# Altium PCB DC SUPPLY.PcbDoc
Units mm, origin at the board's own origin, x right, y up, seen from the top; angles counter-clockwise.
Board outline 96.39 x 54.1 mm, 2 copper layers (Top Layer, Bottom Layer); 46 components, 23 nets, 108 pads, 0 vias.
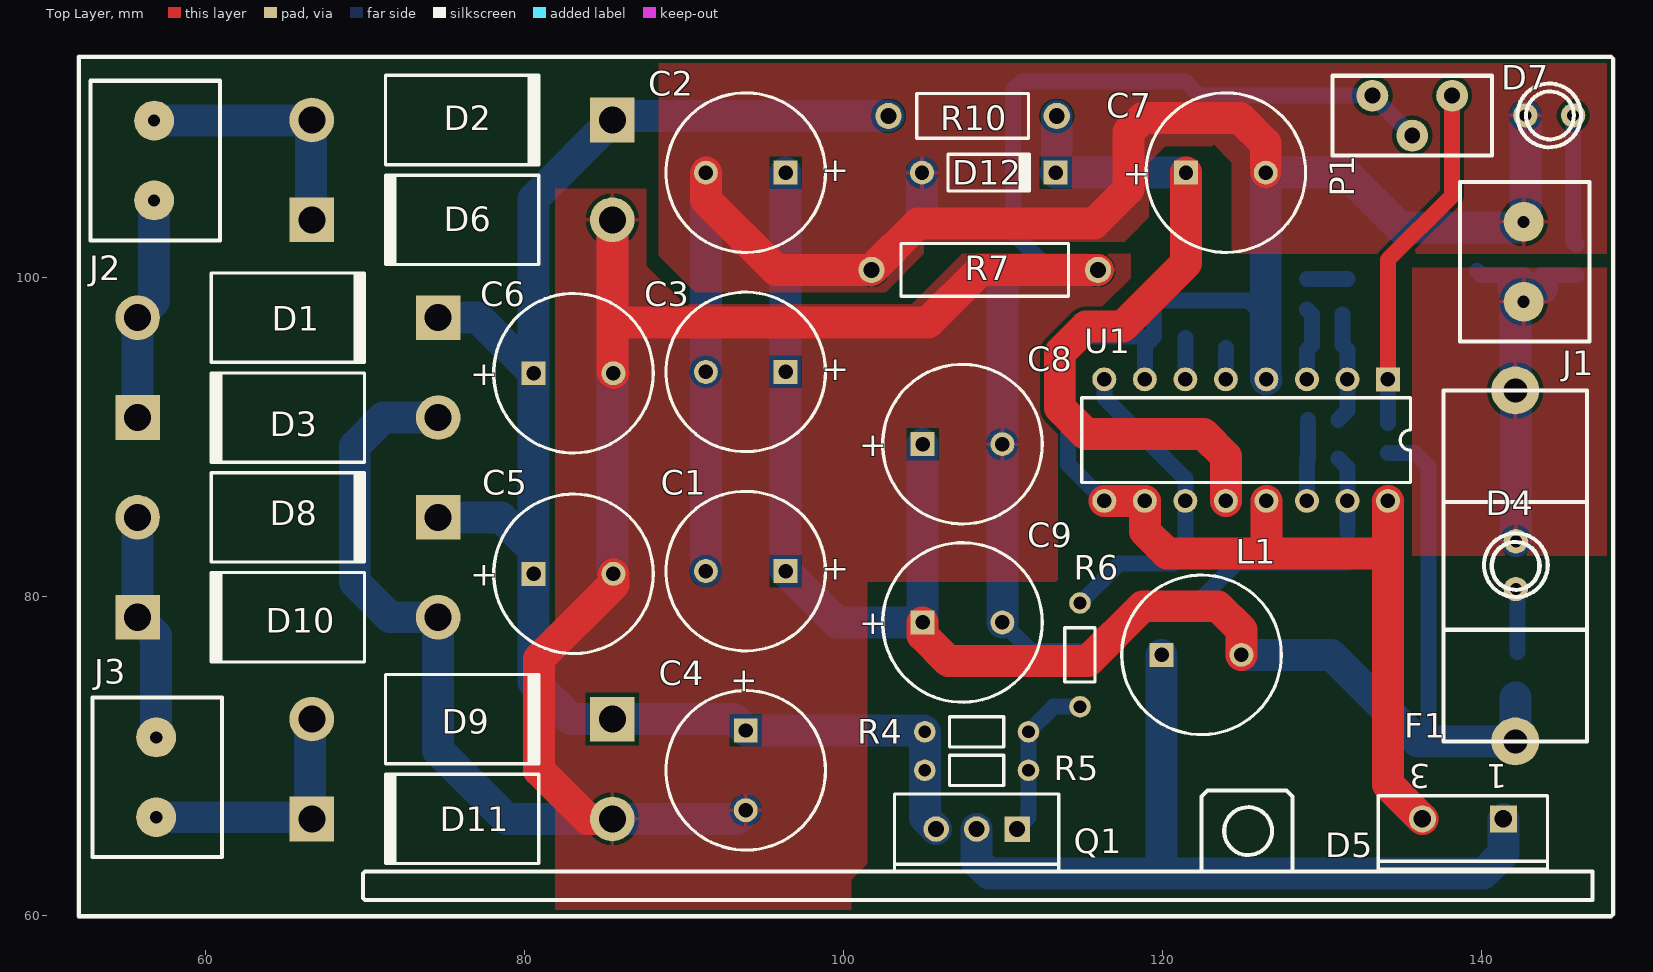
[diagram p0: Top Layer view]
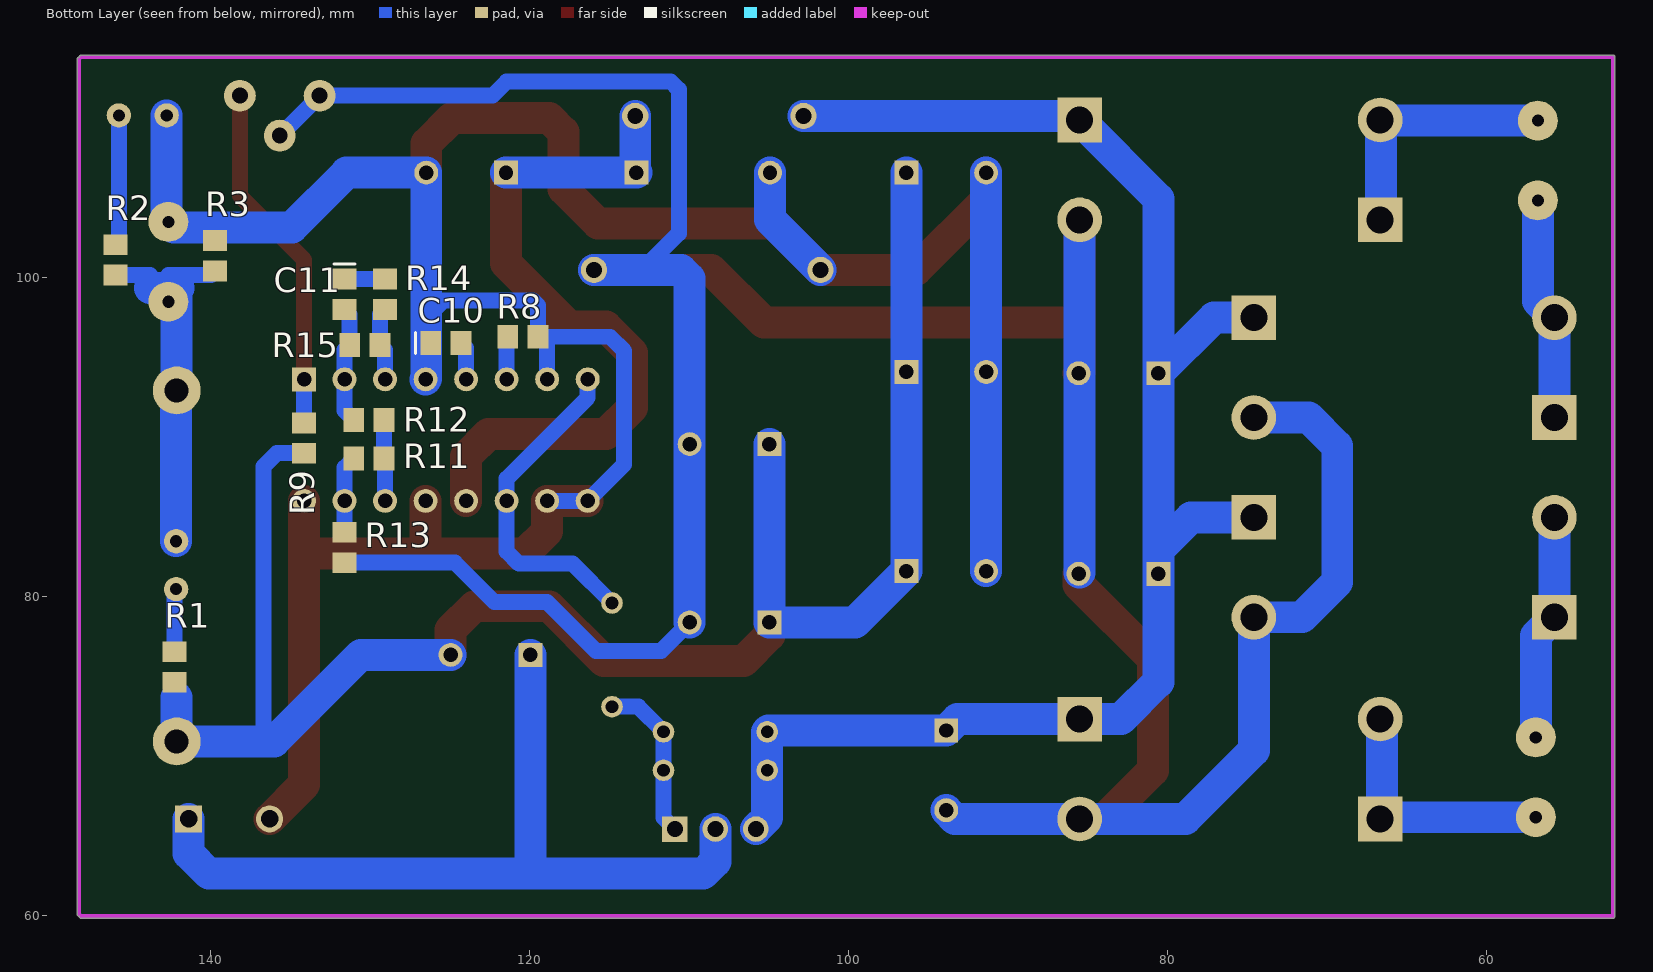
[diagram p1: Bottom Layer view, seen from below]

## Layer stack, top to bottom
Top Solder: solder mask 0.0102, Solder Resist, Dk 3.5
Top Layer: signal copper 0.0356
Dielectric 1: dielectric 0.32, FR-4, Dk 4.8
Bottom Layer: signal copper 0.0356
Bottom Solder: solder mask 0.0102, Solder Resist, Dk 3.5

## Board outline
52.07,59.817 148.082,59.817 ccw(c148.082,59.944) 148.173,59.854 ccw(c148.082,59.944) 148.209,59.944 ccw(c148.209,60.071) 148.299,59.98 ccw(c148.209,60.071) 148.336,60.071 148.336,113.665 ccw(c148.209,113.665) 148.299,113.756 ccw(c148.209,113.665) 148.209,113.792 ccw(c148.082,113.792) 148.173,113.882 ccw(c148.082,113.792) 148.082,113.919 52.07,113.919 ccw(c52.07,113.792) 51.943,113.792 51.943,59.944 ccw(c52.07,59.944)

## Design rules (kind name [scope] priority, off if disabled: settings)
Clearance [All] p1: gap=0.254
PolygonConnect [All] p1: connectstyle=Relief reliefconductorwidth=0.254 reliefentries=4 polygonreliefangle="90 Angle" airgapwidth=0.254
RoutingVias [All] p1: holewidth=0.711 width=1.27 viastyle="Through Hole" minholewidth=0.711 minwidth=1.27 maxholewidth=0.711 maxwidth=1.27
SolderMaskExpansion [All] p1: expansion=0.102
Width [All] p1: maxlimit=3 minlimit=0.254 preferedwidth=1
29 further rules are at their usual default settings.

## Components (designator, comment, footprint, x,y, rotation, side; value= is the part's Value field where it differs from the comment)
C1 "470uF" CAPPR5-10X16 93.853,81.576 r180 top
C2 "470uF" CAPPR5-10X16 93.853,106.553 r180 top
C3 "470uF" CAPPR5-10X16 93.853,94.065 r180 top
C4 "470uF" CAPPR5-10X16 93.853,69.088 r270 top
C5 "470uF" CAPPR5-10X16 83.058,81.407 r0 top
C6 "470uF" CAPPR5-10X16 83.058,93.98 r0 top
C7 "470uF" CAPPR5-10X16 123.952,106.553 r0 top
C8 "470uF" CAPPR5-10X16 107.442,89.535 r0 top
C9 "470uF" CAPPR5-10X16 107.442,78.359 r0 top
C10 "" 0805 125.222,95.885 r180 bottom
C11 "" 0805 131.572,98.933 r270 bottom
D1 "1N5400" DO-201AD 65.151,97.463 r0 top
D2 "1N5400" DO-201AD 76.073,109.855 r0 top
D3 "1N5400" DO-201AD 65.151,91.204 r180 top
D4 "FUSE BLOW LED" "LED 3 mm" 142.098,81.901 r270 top
D5 "Diode 10TQ035" TO-220AC 138.811,66.04 r180 top
D6 "1N5400" DO-201AD 76.073,103.596 r180 top
D7 "DC OK LED" "LED 3 mm" 144.272,110.109 r0 top
D8 "1N5400" DO-201AD 65.151,84.945 r0 top
D9 "1N5400" DO-201AD 76.073,72.299 r0 top
D10 "1N5400" DO-201AD 65.151,78.686 r180 top
D11 "1N5400" DO-201AD 76.073,66.04 r180 top
D12 "ZD15V" 299-02 109.093,106.553 r0 top
F1 "Fuse holder" "FUSE HOLDER" 142.24,81.915 r90 top
J1 "T3" TERMINAL_BLOCK_2 142.748,100.838 r0 top
J2 "T1" TERMINAL_BLOCK_2 56.896,107.188 r0 top
J3 "T2" TERMINAL_BLOCK_2 57.023,68.521 r0 top
L1 "B82462G4821M000" CAPPR5-10X16 122.428,76.327 r0 top
P1 "100K" POT 135.636,110.128 r180 top
Q1 "TIP125" 221A-02 108.331,65.405 r180 top
R1 "1K" ERA-0805 142.24,75.565 r270 bottom
R2 "2K2" ERA-0805 145.923,101.092 r270 bottom
R3 "2K2" ERA-0805 139.7,101.346 r270 bottom
R4 "100R" RD3.2x1.7 108.331,71.501 r0 top
R5 "100R" RD3.2x1.7 108.331,69.088 r0 top
R6 "100R" RD3.2x1.7 114.808,76.327 r270 top
R7 "0R22" R9x2.8 108.839,100.457 r180 top
R8 "47K" ERA-0805 120.396,96.266 r0 bottom
R9 "10K" ERA-0805 134.112,89.916 r270 bottom
R10 "1K" RD6.35x2.3 108.077,110.109 r180 top
R11 "5K1" ERA-0805 130.048,88.646 r180 bottom
R12 "5K1" ERA-0805 130.048,91.059 r180 bottom
R13 "150R" ERA-0805 131.572,83.058 r90 bottom
R14 "47K" ERA-0805 129.032,98.933 r270 bottom
R15 "1M" ERA-0805 130.302,95.758 r180 bottom
U1 "TL494CJ" J016 125.222,89.789 r180 top

## Footprints (in the part's own frame and the unit in brackets; to place one, negate y for a bottom-side part, rotate by r counter-clockwise, add the part's x,y. Pads: shape width x height; smd on the part's side, far side on the other; paste and mask are expansions set on the pad)
221A-02 [mm] "TO, Thru-Hole, Vertical, Heatsink Mounted; 3 In-Line Leads; Pitch 2.54 mm"
  rect 1.6x1.6 hole 1: 1(-2.54,0)
  round 1.6 hole 1: 2(0,0) 3(2.54,0)
  silkscreen extent -5.15,-2.2 5.15,2.7
299-02 [mm] "Diode, Axial; Body 5.1 x 2.3 mm (LxDia. max), Lead Dia. 0.56 mm (max)"
  round 1.5 hole 0.9: 1(-4.19,0)
  rect 1.5x1.5 hole 0.9: 2(4.19,0)
  silkscreen extent -2.55,-1.15 2.65,1.15
0805 [mm] "Chip Capacitor; Body 2.0 x 1.2 mm (LxW typ)"
  rect 1.3x1.5 smd: 1(-0.95,0) 2(0.95,0)
  silkscreen extent -1.9,-0.65 -1.9,0.65
CAPPR5-10X16 [mm] "Capacitor, Electrolytic, Radial; Body 10 x 16 mm (Dia.xH typ); Pin Spacing 5 mm (typ)"
  rect 1.5x1.5 hole 0.9: 1(-2.5,0)
  round 1.5 hole 0.9: 2(2.5,0)
  silkscreen extent -5,-5 5,5
DO-201AD [mm] "Diode, Axial; Body 9.5 x 5.6 mm (LxDia. max), Lead Dia. 1.32 mm (max)"
  round 2.8 hole 1.7: 1(-9.42,0)
  rect 2.8x2.8 hole 1.7: 2(9.42,0)
  silkscreen extent -4.8,-2.8 4.9,2.8
ERA-0805 [mm] "Chip Resistor; Body 2 x 1.3 mm (LxW typ)"
  rect 1.3x1.5 smd: 1(-0.95,0) 2(0.95,0)
"FUSE HOLDER" [mm] "Small glas fuse holder"
  round 3 hole 1.5: 1(-11.014,0.142) 2(10.986,0.142)
  silkscreen extent -11.01,-4.36 10.99,4.64, body extent -11.01,-3.86 10.99,4.14, height 13
J016 [mm] "DIP; 16 Leads; Row Spacing 7.62 mm; Pitch 2.54 mm"
  rect 1.5x1.5 hole 0.9: 1(-8.89,-3.81)
  round 1.5 hole 0.9: 2(-6.35,-3.81) 3(-3.81,-3.81) 4(-1.27,-3.81) 5(1.27,-3.81) 6(3.81,-3.81) 7(6.35,-3.81) 8(8.89,-3.81) 9(8.89,3.81) 10(6.35,3.81) 11(3.81,3.81) 12(1.27,3.81) 13(-1.27,3.81) 14(-3.81,3.81) 15(-6.35,3.81) 16(-8.89,3.81)
  silkscreen extent -10.3,-2.65 10.3,2.65
"LED 3 mm" [mil] "LED 3 mm"
  round 60 hole 30: 1(-60.95,1.26) 2(57.16,1.26)
  silkscreen extent -81,-77 77,80
POT [mm] "PIHER poti vertical"
  round 2 hole 1: 1(-2.5,-1.25) 2(2.5,-1.25) 3(0,1.25)
  silkscreen extent -5,-2.5 5,2.5
R9x2.8 [mm] "Resistor, Axial; Body 10.5 x 3.3 mm (LxDia. max), Lead Dia. 0.7 mm (max)"
  round 1.65 hole 1: 1(-7.1,0) 2(7.1,0)
  silkscreen extent -5.25,-1.65 5.25,1.65
RD3.2x1.7 [mm] "Resistor, Axial; Body 3.4 x 1.9 mm (LxDia. max), Lead Dia. 0.5 mm (max)"
  round 1.35 hole 0.8: 1(-3.25,0) 2(3.25,0)
  silkscreen extent -1.7,-0.95 1.7,0.95
RD6.35x2.3 [mm] "Resistor, Axial; Body 7 x 2.8 mm (LxDia. max), Lead Dia. 0.65 mm (max)"
  round 1.65 hole 1: 1(-5.275,0) 2(5.275,0)
  silkscreen extent -3.5,-1.4 3.5,1.4
TERMINAL_BLOCK_2 [mm] "Terminal block 2 pin"
  round 2.5 hole 0.762: 1(-0.127,-2.373) 2(-0.127,2.627)
  silkscreen extent -4.13,-4.87 4,5.13
TO-220AC [mm] "TO, Thru-Hole, Vertical, Heatsink Mounted; 3 In-Line Leads (1 Absent); Pitch 2.54 mm"
  rect 1.7x1.7 hole 1.1: 1(-2.54,0)
  round 1.7 hole 1.1: 3(2.54,0)
  silkscreen extent -5.3,-1.45 5.3,3.15

## Part data
C1 C2 C3 C4 C5 C6 C7 C8 C9: library part EKA00DD347F00, "Aluminum Electrolytic Capacitor, Radial Style with Long Leads: 470uF, 35V"
C10 C11: library part C0805, "Ceramic Chip Capacitor - Standard"
D1 D2 D3 D6 D8 D9 D10 D11: "3.0 Ampere General Purpose Rectifier"
D4 D7: library part "3mm LED", "3mm LED"
D5: "Schottky Rectifier"
D12: library part 1N746A, "500 mW Hermetically Sealed Glass Silicon Zener Diode"
F1: "glas fuse holder"
J1 J2 J3: library part "Terminal block 2", "2 pins terminal block"
L1: "SMT Power Inductor; Size 6.3×6.3×3.0mm, ±20% Tolerance, 0.82uH, 3.45A"
P1: library part POT, "PIHER poti vertical pcb mounting"
Q1: "Darlington Silicon Power PNP Transistor, 8 Amp, 60 Volts and 65 Watts"
R1 R2 R3 R8 R9 R11 R12 R13 R14 R15: library part ERA6Y, "Rectangular Thick Film Chip Resistor, 10 Ohm to 1M Ohm Range, 0.1% and 0.5% Tolerance, 0805 Size, 0.1 W"
R4 R5 R6: library part ERD6FC, "Flame-Retardant Fuse Type Carbon Film Resistor, 4.7 Ohm to 1k Ohm Range, 2% and 5% Tolerance, 0.166 W"
R7: library part ERG1, "Metal Oxide Film Resistor, 0.1 Ohm to 100k Ohm Range, 2% and 5% Tolerance, 1 W"
R10: library part ERDS1T, "Carbon Film Resistor, 1 Ohm to 3.3M Ohm Range, 5% Tolerance, 0.5 W"
U1: "Pulse-Width-Modulation Control Circuit"

## Nets (pads, with @x,y where several pads share a name; then routed paths per layer and width w, separated by ;. In a path a pad name is that pad's centre, name@x,y a point inside that pad or via, vN(x,y) a via of type N, cw(c..) or ccw(c..) an arc to the next point about the centre after c; other vN are vias at no path point)
NetC1_1: C1.1 C2.1 C3.1 C8.1 C9.1 F1.1 L1.2 R1.2 R9.2 | length 113.7
  Top Layer w2: C9.1 104.942,77.557 106.553,75.946 115.316,75.946 118.745,79.375 123.444,79.375 124.928,77.891 L1.2
  Bottom Layer w1: R9.2 135.824,88.966 136.652,88.138 136.652,71.571 135.982,70.901
  Bottom Layer w2: C2.1 C3.1 C1.1 99.57,78.359 C9.1 C8.1 ; L1.2 130.556,76.327 135.982,70.901 F1.1 142.098,73.645 142.113,73.66
NetC4_1: C4.1 C5.1 C6.1 D1.2 D2.2 D8.2 D9.2 Q1.3 R4.1 R5.1 R10.2 | length 101.2
  Bottom Layer w2: D8.2 78.504,84.945 80.558,82.891 ; D1.2 77.075,97.463 C6.1 ; R10.2 85.747,110.109 D2.2 80.558,104.92 C6.1 ; Q1.3 105.081,66.115 R5.1 R4.1 104.994,71.588 C4.1 93.142,72.299 D9.2 82.895,72.299 80.558,74.636 C5.1 80.558,82.891 ; 80.558,82.891 C6.1
NetC7_1: C7.1 D12.2 R10.1 U1.12 | length 45.5
  Top Layer w2: C7.1 121.452,100.878 117.475,96.901 115.189,96.901 113.538,95.25 113.538,91.821 115.189,90.17 122.555,90.17 123.952,88.773 U1.12
  Bottom Layer w2: D12.2 C7.1 ; D12.2@113.352,106.622 R10.1
NetC10_2: C10.2 U1.5 | length 2
  Bottom Layer w1: U1.5 C10.2@123.952,95.565
NetC11_1: C11.1 R14.1 | length 2.5
  Bottom Layer w1: R14.1 C11.1
NetC11_2: C11.2 R12.1 R15.1 U1.2 | length 7
  Bottom Layer w1: R12.1 131.572,91.633 U1.2 131.572,95.438 R15.1 C11.2@131.252,97.663
NetD1_1: D1.1 D3.2 J2.1 | length 14
  Bottom Layer w2: D3.2 D1.1 56.769,98.501 J2.1
NetD2_1: D2.1 D6.2 J2.2 | length 16.1
  Bottom Layer w2: J2.2 66.613,109.815 66.613,103.636 D6.2
NetD4_1: D4.1 F1.2 J1.1 R2.2 R3.2 | length 23.7
  Bottom Layer w1: R3.2 139.954,100.142 142.621,100.142 J1.1@142.621,99.314 ; 143.764,100.142 R2.2
  Bottom Layer w2: D4.1 142.13,92.869 F1.2 142.098,99.202 141.986,99.314 142.621,99.314 143.764,99.314
NetD4_2: D4.2 R1.1 | length 4
  Bottom Layer w1: D4.2 142.24,80.339 R1.1
NetD5_1: D5.1 L1.1 Q1.2 | length 51.8
  Bottom Layer w2: Q1.2 108.331,63.373 109.093,62.611 140.081,62.611 141.351,63.881 D5.1 ; 119.888,62.611 119.928,62.651 L1.1
NetD7_2: D7.2 R2.1 | length 8.2
  Bottom Layer w1: D7.2 145.724,102.241 R2.1
NetD8_1: D8.1 D10.2 J3.2 | length 14.3
  Bottom Layer w2: D8.1 D10.2 56.896,77.521 J3.2
NetD9_1: D9.1 D11.2 J3.1 | length 15.8
  Bottom Layer w2: J3.1 66.545,66.148 66.545,72.191 D9.1
NetP1_1: P1.1 R9.1 U1.1 | length 22.2
  Top Layer w1: U1.1 134.112,101.092 138.136,105.116 P1.1
  Bottom Layer w1: R9.1 U1.1
NetQ1_1: Q1.1 R4.2 R5.2 R6.2 | length 10.3
  Bottom Layer w1: Q1.1 111.581,66.115 R5.2 R4.2 113.157,73.077 R6.2
NetR6_1: R6.1 U1.8 U1.11 | length 20.8
  Bottom Layer w1: R6.1 117.273,82.042 120.65,82.042 121.412,82.804 U1.11 121.412,87.376 116.332,92.456 U1.8
NetR8_2: R8.2 U1.6 | length 2.6
  Bottom Layer w1: U1.6 R8.2@121.412,96.2
NetR11_1: R11.1 R13.2 U1.15 | length 4.9
  Bottom Layer w1: R11.1 131.572,88.072 U1.15 R13.2
NetR11_2: R11.2 R12.2 U1.14 | length 5.1
  Bottom Layer w1: U1.14 129.032,88.58 R11.2 R12.2
NetR14_2: R14.2 R15.2 U1.3 | length 4.6
  Bottom Layer w1: U1.3 129.032,95.438 R15.2 129.352,97.663 R14.2
VSS: C1.2 C2.2 C3.2 C7.2 C10.1 D5.3 D7.1 D12.1 J1.2 R3.1 R7.2 R8.1 U1.4 U1.7 U1.9 U1.10 U1.13 U1.16 | length 192.1
  Top Layer w2: C2.2 91.353,104.862 95.758,100.457 R7.2 104.66,103.378 115.697,103.378 117.856,105.537 117.856,109.093 118.745,109.982 124.841,109.982 126.452,108.371 C7.2 ; U1.9 U1.10 118.872,84.074 120.269,82.677 126.746,82.677 ; U1.13 126.492,82.931 126.746,82.677 ; U1.16 134.112,82.677 ; D5.3 134.112,68.199 134.112,82.677 ; 126.746,82.677 134.112,82.677
  Bottom Layer w1: U1.10 U1.9 114.046,88.265 114.046,95.377 114.935,96.266 R8.1 ; U1.7 118.872,95.692 R8.1 ; 126.111,97.79 125.349,98.552 119.761,98.552 119.446,98.237 R8.1
  Bottom Layer w2: C1.2 C3.2 C2.2 ; R7.2 104.903,103.621 D12.1 ; U1.4 126.452,93.639 C7.2 131.445,106.553 134.874,103.124 142.28,103.124 J1.2 142.724,103.568 D7.1
VSS1: C4.2 C5.2 C6.2 C8.2 C9.2 D3.1 D6.1 D10.1 D11.1 P1.2 P1.3 R7.1 R13.1 | length 225.3
  Top Layer w2: D11.1 83.947,66.04 80.899,69.088 80.899,76.073 85.558,80.732 C5.2 ; D6.1 85.493,97.155 ; C6.2 85.493,94.045 85.493,97.155 ; R7.1 108.585,100.457 105.283,97.155 85.493,97.155
  Bottom Layer w1: C9.2 111.72,76.581 115.824,76.581 118.872,79.629 122.174,79.629 124.653,82.108 R13.1 ; 112.903,100.457 110.617,102.743 110.617,111.76 111.125,112.268 121.412,112.268 122.302,111.378 P1.2 P1.3
  Bottom Layer w2: D3.1 71.138,91.204 69.342,89.408 69.342,80.899 71.555,78.686 D10.1 74.571,70.336 78.867,66.04 D11.1 93.305,66.04 C4.2 ; C5.2@85.493,81.472 D6.1 ; C9.2 C8.2 109.942,99.909 110.49,100.457 112.903,100.457 R7.1

## Polygon pours and split planes (outlines as drawn)
VSS on Top Layer "Bottom Layer-No Net 1" (solid, remove dead copper, pour order 2): 91.567,113.792 91.685,113.91 148.131,113.91 148.131,101.678 148.209,101.6 148.082,101.473 124.333,101.473 124.333,107.188 123.19,108.331 123.063,108.204 120.142,108.204 119.126,107.188 119.126,103.759 117.856,102.489 117.602,102.235 105.029,102.235 105.029,101.473 102.616,99.06 91.059,99.06 90.678,99.06 88.519,101.219 88.392,101.346 88.392,113.792
VSS1 on Top Layer "Bottom Layer-No Net 1" (solid, remove dead copper, pour order 4): 82.042,105.537 87.63,105.537 87.63,100.711 90.17,98.171 90.297,98.298 104.14,98.298 104.267,98.298 106.934,100.965 107.442,101.473 117.983,101.473 117.983,99.949 113.411,95.377 113.411,91.948 113.411,81.026 113.284,80.899 101.473,80.899 101.473,63.246 101.219,62.992 100.457,62.23 100.457,59.944 81.915,59.944 81.915,105.537
NetD4_1 on Top Layer "Bottom Layer-No Net 1" (solid, remove dead copper, pour order 6): 135.636,100.584 148.209,100.584 148.209,82.55 135.636,82.55 135.636,100.584

## Keep-outs
Keep-Out Layer:
  lines w0.254: 52.07,59.944 52.07,113.792 148.082,113.792 148.209,113.665 148.209,60.071 148.082,59.944 52.07,59.944

## Silkscreen, mask and mechanical layers (free items; w line width, h text height)
Top Overlay:
  circle w0.254: c125.349,65.278 r1.5
  lines w0.254: 70.104,60.96 146.939,60.96 146.939,62.738 70.104,62.738 ; 70.485,60.96 69.977,60.96 69.85,61.087 69.85,62.611 69.977,62.738 70.485,62.738 ; 122.428,62.738 122.428,63.246 122.428,67.437 122.809,67.818 127.762,67.818 128.143,67.437 128.143,63.246 128.143,62.738 ; 148.082,59.944 52.07,59.944 52.07,113.792 148.082,113.792 ; 148.209,60.071 148.209,113.665

## Dimensions
148.082,113.792 to 148.082,59.944 on Mechanical 1
52.07,113.792 to 148.209,113.665 on Mechanical 1

## Text inside footprints (layer, text, board x,y; h text height)
C1: Top Overlay "+" at 100.328,82.326 h1.5 r180
C2: Top Overlay "+" at 100.328,107.303 h1.5 r180
C3: Top Overlay "+" at 100.328,94.815 h1.5 r180
C4: Top Overlay "+" at 93.103,75.563 h1.5 r270
C5: Top Overlay "+" at 76.583,80.657 h1.5
C6: Top Overlay "+" at 76.583,93.23 h1.5
C7: Top Overlay "+" at 117.477,105.803 h1.5
C8: Top Overlay "+" at 100.967,88.785 h1.5
C9: Top Overlay "+" at 100.967,77.609 h1.5
D5: Top Overlay "1" at 141.601,69.465 h1.5 r180; Top Overlay "3" at 136.771,69.465 h1.5 r180